# Altium PCB Arduino UNO R3 shield - full.pcbdoc
Units mil, origin at the board's own origin, x right, y up, seen from the top; angles counter-clockwise.
Board outline 2282.79 x 2105.48 mil, 2 copper layers (Top Layer, Bottom Layer); 24 components, 54 nets, 148 pads, 0 vias.
Unrouted connection lines stored in the file: 3.
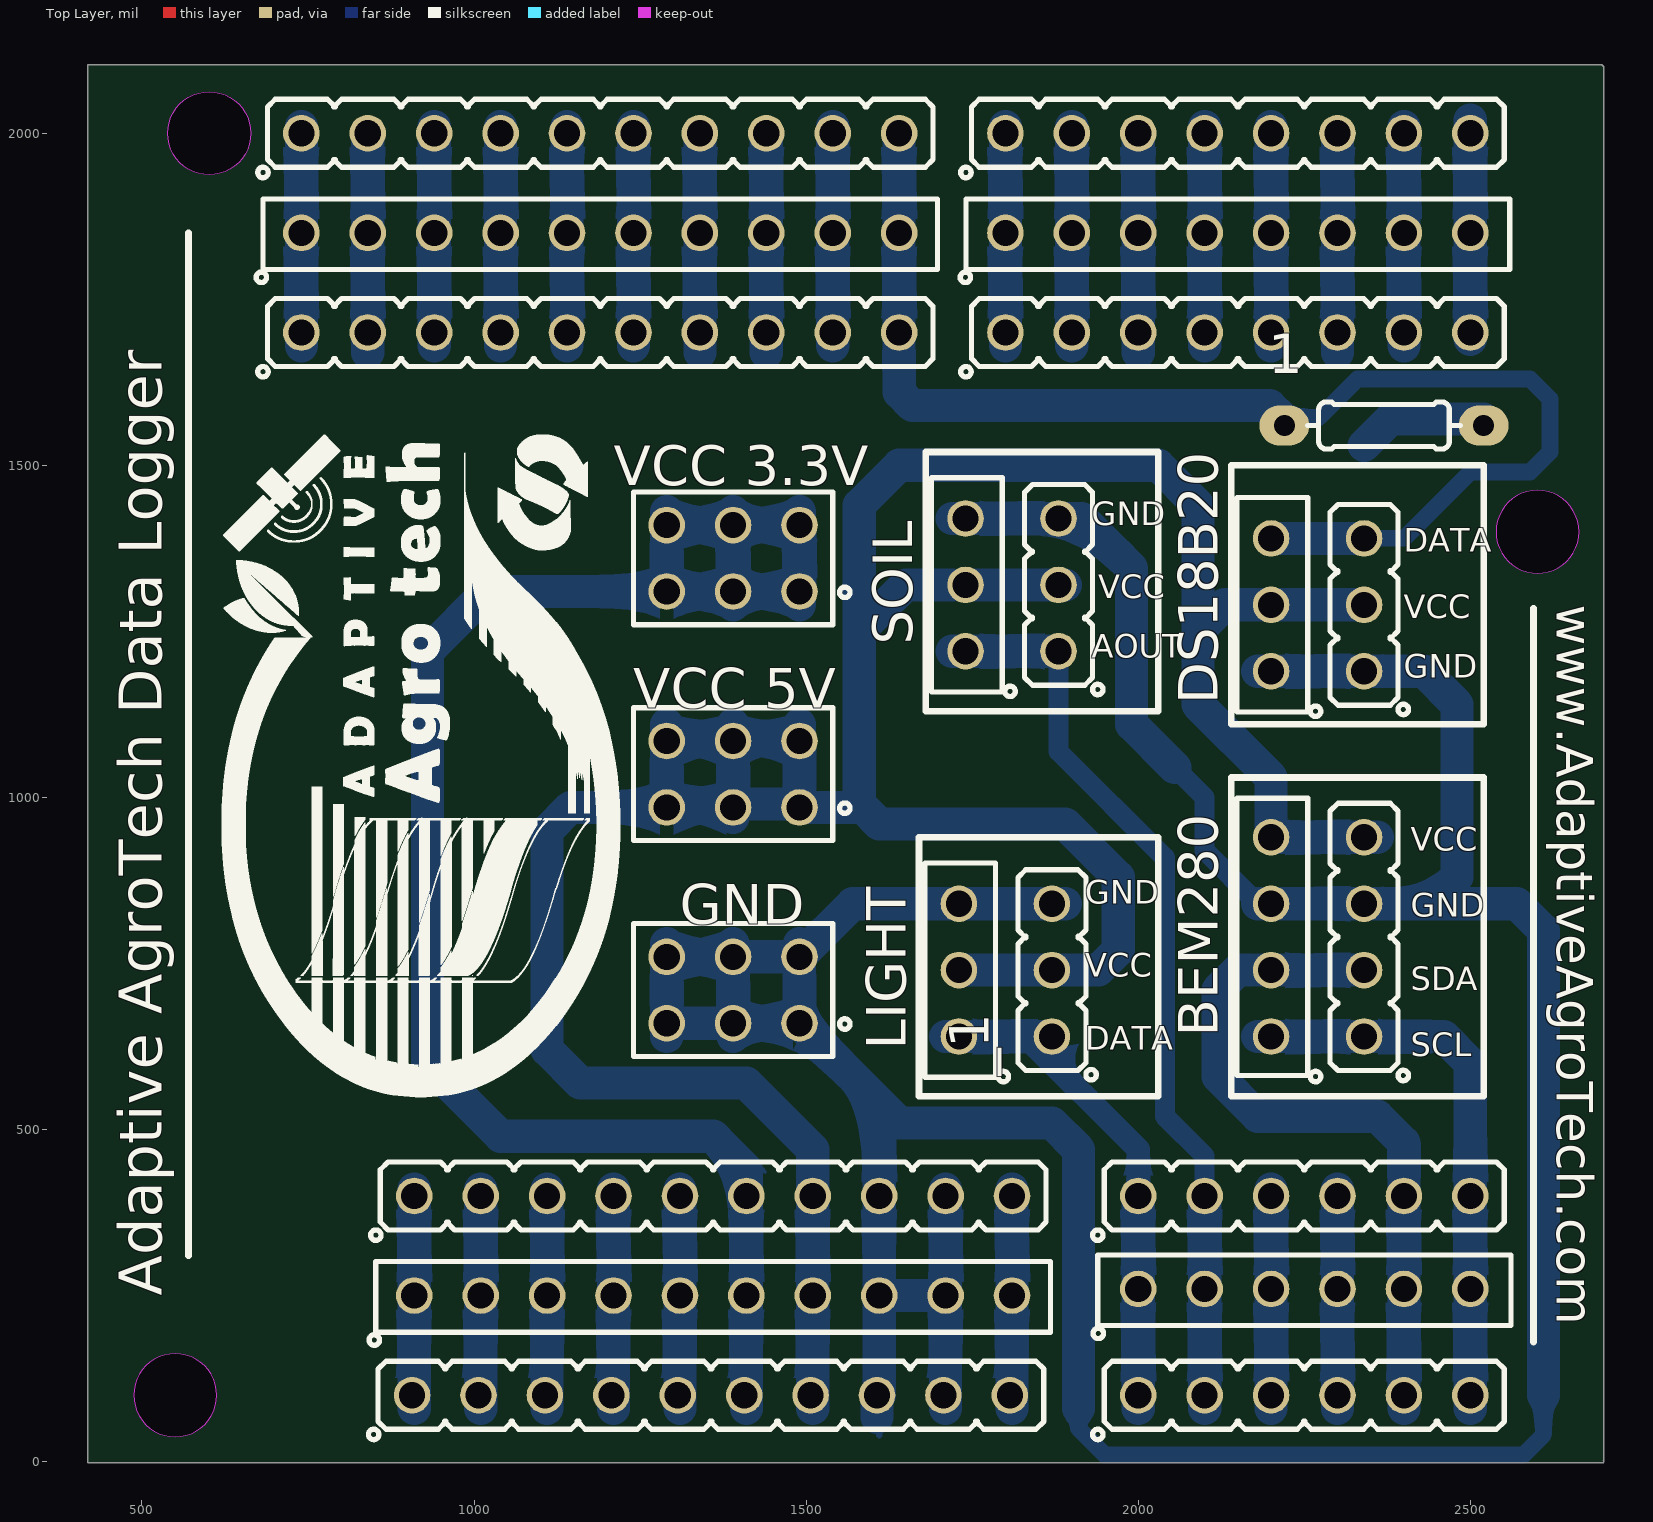
[diagram p0: Top Layer view]
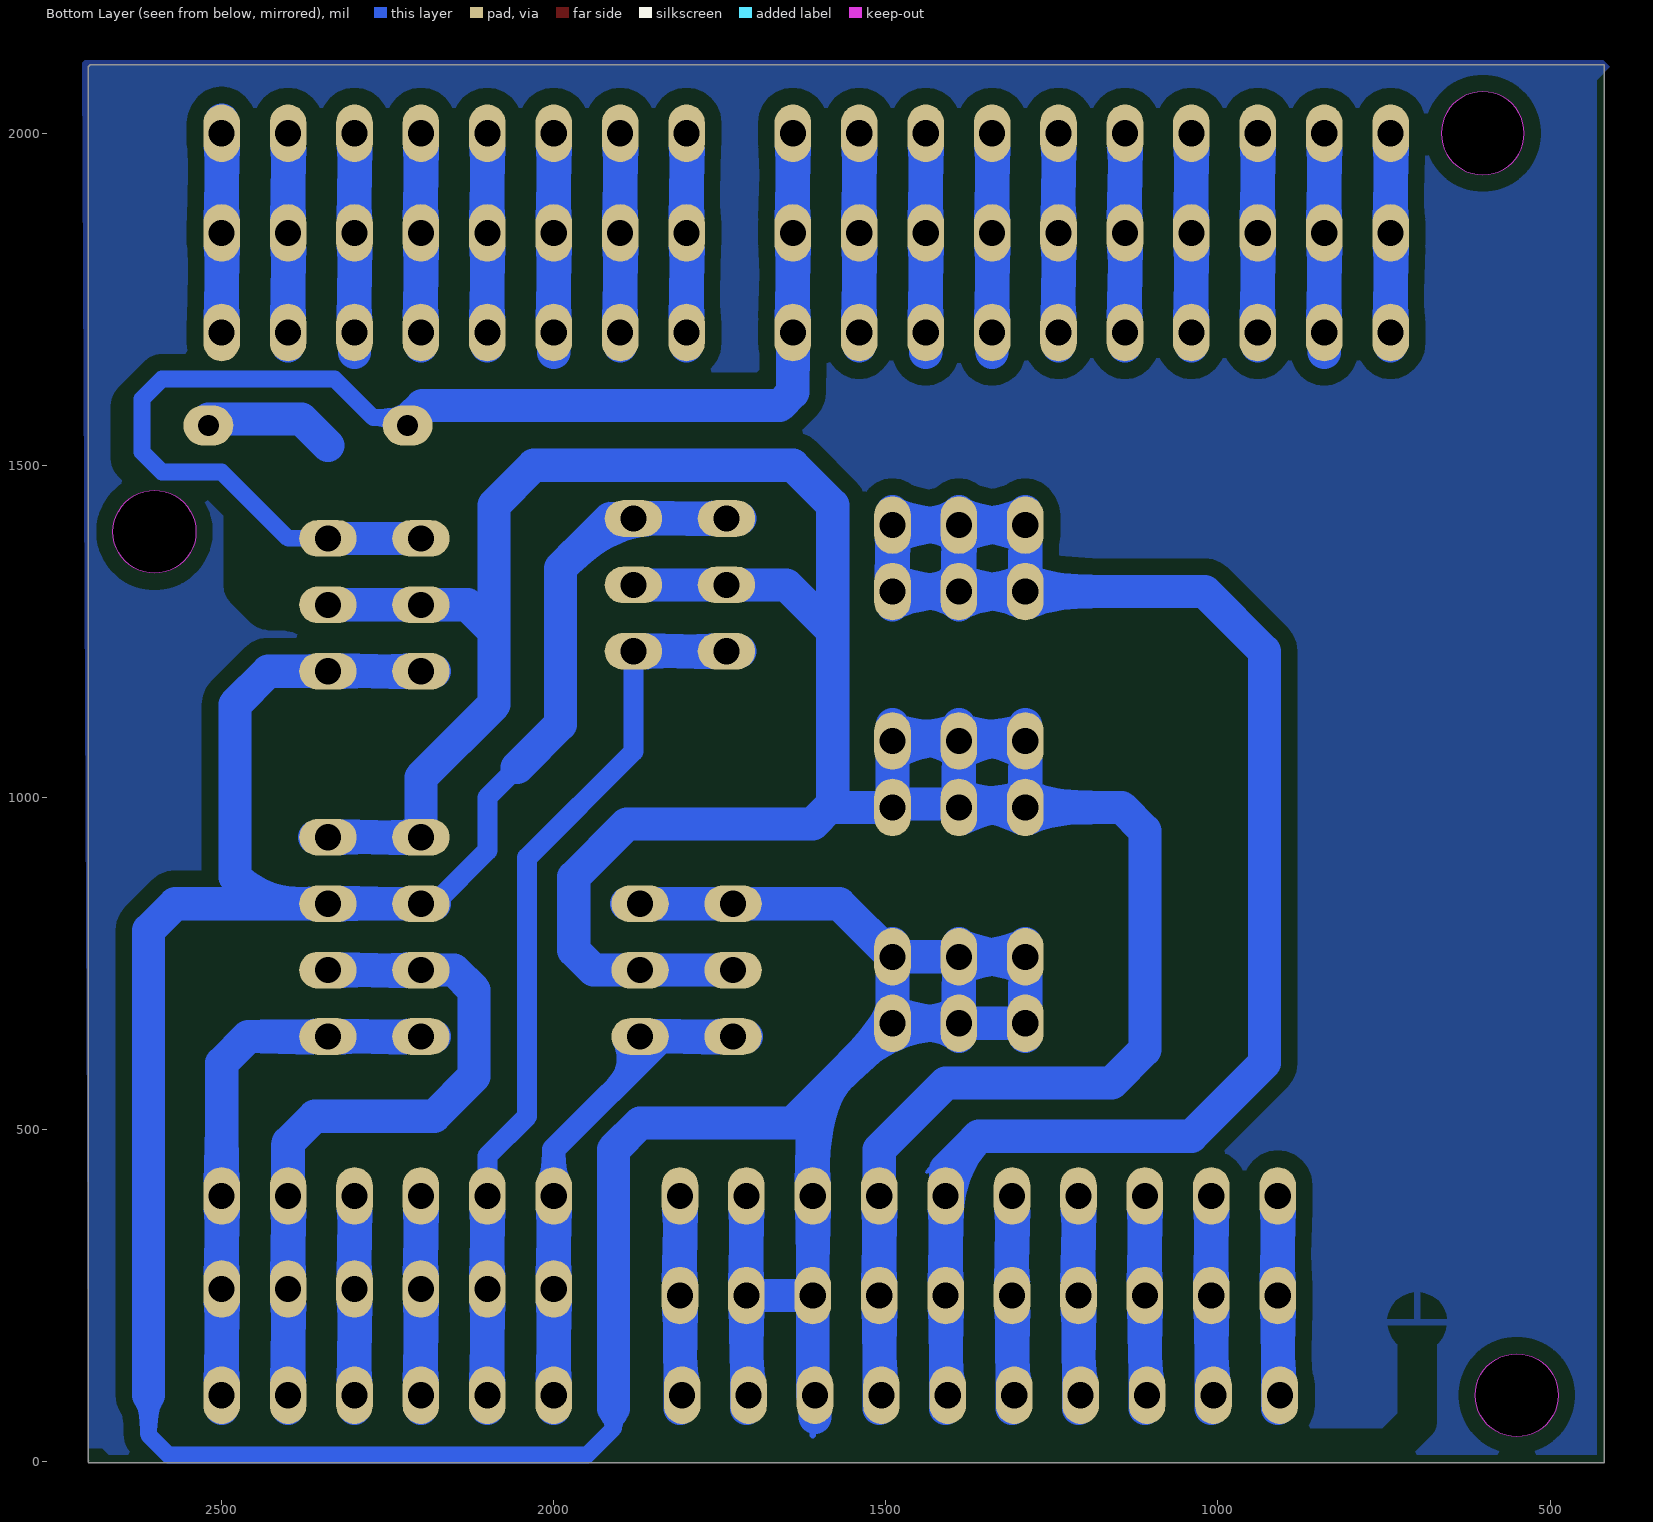
[diagram p1: Bottom Layer view, seen from below]

## Layer stack, top to bottom
Top Solder: solder mask 0.4, Solder Resist, Dk 3.5
Top Layer: signal copper 1.4
Dielectric1: dielectric 12.6, FR-4, Dk 4.8
Bottom Layer: signal copper 1.4
Bottom Solder: solder mask 0.4, Solder Resist, Dk 3.5

## Board outline
418.02,0 ccw(c420,0) 420,-1.98 2698.82,-1.98 ccw(c2698.82,0) 2700.8,0 ccw(c2698.82,0) 2700.42,1.17 ccw(c2698.82,2.33) 2700.8,2.33 2700.8,2099.58 ccw(c2698.82,2099.58) 2698.87,2101.56 ccw(c2696.88,2101.51) 2696.88,2103.5 420,2103.5 ccw(c420,2101.51) 418.02,2101.51
cut-out: 2538.68,1400 ccw(c2601.18,1400) 2601.18,1337.5 ccw(c2601.18,1400) 2663.68,1400 ccw(c2601.18,1400) 2601.18,1462.5 ccw(c2601.18,1400)
cut-out: 487.5,100 ccw(c550,100) 550,37.5 ccw(c550,100) 612.5,100 ccw(c550,100) 550,162.5 ccw(c550,100)
cut-out: 601.18,1937.5 cw(c601.18,2000) 538.68,2000 cw(c601.18,2000) 601.18,2062.5 cw(c601.18,2000) 663.68,2000 cw(c601.18,2000)

## Design rules (kind name [scope] priority, off if disabled: settings)
Clearance [All] p1: gap=10 ignorepadtopadclearanceinfootprint=FALSE
FabricationTestPointUsage TestPointUsage [All] p1: valid=0 allowmultiple=FALSE
FabricationTestpoint Testpoint [All] p1: side=3 testpointundercomponent=TRUE minsize=40 maxsize=100 preferedsize=60 minholesize=0 maxholesize=40 preferedholesize=32 testpointgrid=1 allowsidetop=TRUE allowsidebottom=TRUE usegrid=TRUE gridtolerance=0.01
PolygonConnect [All] p1: connectstyle=Relief reliefconductorwidth=10 reliefentries=4 polygonreliefangle="90 Angle" airgapwidth=10
RoutingVias [All] p1: holewidth=28 width=50 viastyle="Through Hole" minholewidth=28 minwidth=50 maxholewidth=28 maxwidth=50
SilkToSolderMaskClearance SilkscreenOverComponentPads [IsPad] p1: minsilkscreentomaskgap=10 clearancetoexposedcopper=TRUE
SolderMaskExpansion [All] p1: expansion=4
Width [All] p1: maxlimit=82 minlimit=10 preferedwidth=35
27 further rules are at their usual default settings.

## Components (designator, comment, footprint, x,y, rotation, side; value= is the part's Value field where it differs from the comment)
1 "Comment" R0125W_AX03 2370,1560 r0 top
_1 "Comment" HDR_M_1X3 1870,740 r90 top
? "Comment" HDR_M_1X3 1880,1320 r90 top
? "Comment" HDR_F_1X3 1740,1320 r90 top
? "Comment" HDR_F_1X3 1730,740 r90 top
? "Comment" HDR_F_1X4 2200,790 r90 top
? "Comment" HDR_M_1X4 2340,790 r90 top
? "Comment" HDR_F_2X3 1390,710 r180 top
? "Comment" HDR_F_2X3 1390,1035 r180 top
? "Comment" HDR_F_2X3 1390,1360 r180 top
? "Comment" HDR_F_1X3 2200,1290 r90 top
? "Comment" HDR_M_1X3 2340,1290 r90 top
? "Comment" HDR_M_1X6 2250,400 r0 top
? "Comment" HDR_M_1X10 1360,400 r0 top
? "Comment" HDR_F_1X10 1360,250 r0 top
? "Comment" HDR_M_1X10 1190,1700 r0 top
? "Comment" HDR_M_1X8 2150,1700 r0 top
? "Comment" HDR_M_1X10 1190,2000 r0 top
? "Comment" HDR_F_1X6 2250,260 r0 top
? "Comment" HDR_M_1X6 2250,100 r0 top
? "Comment" HDR_M_1X8 2150,2000 r0 top
? "Comment" HDR_M_1X10 1356.69,100 r0 top
? "Comment" HDR_F_1X10 1190,1850 r0 top
? "Comment" HDR_F_1X8 2150,1850 r0 top

## Footprints (in the part's own frame and the unit in brackets; to place one, negate y for a bottom-side part, rotate by r counter-clockwise, add the part's x,y. Pads: shape width x height; smd on the part's side, far side on the other; paste and mask are expansions set on the pad)
HDR_F_1X3 [mm] "HEADER FEMALE pitch: 2.54mm"
  round 1.4 / inner round 1.4 / far side oval 1.4x2.2 hole 1 mask+0.1: 1(-2.54,0) 2(0,0) 3(2.54,0)
  silkscreen extent -4.27,-1.9 4.1,1.3, body extent -3.93,-1.3 3.94,1.2, height 8.5
HDR_F_1X4 [mm] "HEADER FEMALE pitch: 2.54mm"
  round 1.4 / inner round 1.4 / far side oval 1.4x2.2 hole 1 mask+0.1: 1(-3.81,0) 2(-1.27,0) 3(1.27,0) 4(3.81,0)
  silkscreen extent -5.54,-1.9 5.3,1.3, body extent -5.2,-1.3 5.21,1.2, height 8.5
HDR_F_1X6 [mm] "HEADER FEMALE pitch: 2.54mm"
  round 1.4 / inner round 1.4 / far side oval 1.4x2.2 hole 1 mask+0.1: 1(-6.35,0) 2(-3.81,0) 3(-1.27,0) 4(1.27,0) 5(3.81,0) 6(6.35,0)
  silkscreen extent -8.08,-1.9 7.9,1.3, body extent -7.74,-1.3 7.75,1.2, height 8.5
HDR_F_1X8 [mm] "HEADER FEMALE pitch: 2.54mm"
  round 1.4 / inner round 1.4 / far side oval 1.4x2.2 hole 1 mask+0.1: 1(-8.89,0) 2(-6.35,0) 3(-3.81,0) 4(-1.27,0) 5(1.27,0) 6(3.81,0) 7(6.35,0) 8(8.89,0)
  silkscreen extent -10.62,-1.9 10.4,1.3, body extent -10.28,-1.3 10.29,1.2, height 8.5
HDR_F_1X10 [mm] "HEADER FEMALE pitch: 2.54mm"
  round 1.4 / inner round 1.4 / far side oval 1.4x2.2 hole 1 mask+0.1: 1(-11.43,0) 2(-8.89,0) 3(-6.35,0) 4(-3.81,0) 5(-1.27,0) 6(1.27,0) 7(3.81,0) 8(6.35,0) 9(8.89,0) 10(11.43,0)
  silkscreen extent -13.16,-1.9 12.9,1.3, body extent -12.82,-1.3 12.83,1.2, height 8.5
HDR_F_2X3 [mm] "Connector; Header; 3x2 Position"
  round 1.4 / inner round 1.4 / far side oval 1.4x2.2 hole 1: 1(-2.54,1.27) 2(-2.54,-1.27) 3(0,1.27) 4(0,-1.27) 5(2.54,1.27) 6(2.54,-1.27)
  silkscreen extent -4.47,-2.54 3.81,2.54, body extent -3.81,-2.54 3.81,2.54, height 8.5
HDR_M_1X3 [mm] "Connector; Header; 3 Position"
  round 1.4 / inner round 1.4 / far side oval 1.4x2.2 hole 1 mask+0.1: 1(-2.54,0) 2(0,0) 3(2.54,0)
  silkscreen extent -4.2,-1.7 3.84,1.3, body extent -3.78,-1.27 3.84,1.27, height 8.54
HDR_M_1X4 [mm] "Connector; Header; 4 Position"
  round 1.4 / inner round 1.4 / far side oval 1.4x2.2 hole 1 mask+0.1: 1(-3.81,0) 2(-1.27,0) 3(1.27,0) 4(3.81,0)
  silkscreen extent -5.5,-1.7 5.11,1.3, body extent -5.08,-1.27 5.08,1.27, height 8.54
HDR_M_1X6 [mm] "Connector; Header; 6 Position"
  round 1.4 / inner round 1.4 / far side oval 1.4x2.2 hole 1 mask+0.1: 1(-6.35,0) 2(-3.81,0) 3(-1.27,0) 4(1.27,0) 5(3.81,0) 6(6.35,0)
  silkscreen extent -8.1,-1.7 7.65,1.3, body extent -7.62,-1.3 7.62,1.19, height 8.54
HDR_M_1X8 [mm] "Connector; Header; 8 Position"
  round 1.4 / inner round 1.4 / far side oval 1.4x2.2 hole 1 mask+0.1: 1(-8.89,0) 2(-6.35,0) 3(-3.81,0) 4(-1.27,0) 5(1.27,0) 6(3.81,0) 7(6.35,0) 8(8.89,0)
  silkscreen extent -10.6,-1.7 10.19,1.3, body extent -10.16,-1.3 10.16,1.19, height 8.54
HDR_M_1X10 [mm] "Connector; Header; 10 Position"
  round 1.4 / inner round 1.4 / far side oval 1.4x2.2 hole 1 mask+0.1: 1(-11.43,0) 2(-8.89,0) 3(-6.35,0) 4(-3.81,0) 5(-1.27,0) 6(1.27,0) 7(3.81,0) 8(6.35,0) 9(8.89,0) 10(11.43,0)
  silkscreen extent -13.1,-1.7 12.73,1.3, body extent -12.7,-1.3 12.7,1.19, height 8.54
R0125W_AX03 [mil] "RESISTOR 1/8 WATT, AXIAL0.3 INCH SPACING"
  oval 75x60 hole 31.5: 1(-150,0) 2(150,0)
  silkscreen extent -115,-35 115,35, body extent -164,-33 164,33, height 73

## Nets (pads, with @x,y where several pads share a name; then routed paths per layer and width w, separated by ;. In a path a pad name is that pad's centre, name@x,y a point inside that pad or via, vN(x,y) a via of type N, cw(c..) or ccw(c..) an arc to the next point about the centre after c; other vN are vias at no path point)
22: ?.1@2200,640 ?.1@2340,640 ?.6@2500,100 ?.6@2500,260 ?.6@2500,400 | length 886.6
  Bottom Layer w50: ?.1@2180,640 2200,640 2340,640 2460,640 2500,600 ?.6@2500,380 ; ?.6@2500,80 ?.6@2500,410
???: ?.1@1490,660 ?.1@2200,1190 ?.1@2340,1190 ?.2@1490,760 ?.3@1390,660 ?.3@1730,840 ?.3@1740,1420 ?.3@1880,1420 ?.3@2200,840 ?.3@2340,840 ?.4@1390,760 ?.5@1290,660 ?.6@1290,760 ?.8@1606.69,100 ?.8@1610,250 ?.8@1610,400 ?.9@1706.69,100 ?.9@1710,250 ?.9@1710,400 | length 6514.1
  Bottom Layer w10: ?.8@1606.69,80 1610,76.69 1610,40
  Bottom Layer w25: 1910,80 1910,50 1950,10 2580,10 2610,40 2610,100
  Bottom Layer w30: 2055,1045 2100,1000 2100,920 ?.3@2180,840
  Bottom Layer w50: ?.5@1290,640 ?.5@1290,660 ; ?.6@1290,780 ?.6@1290,760 ; ?.3@1390,640 ?.3@1390,660 ; ?.4@1390,780 ?.4@1390,760 ; ?.1@1470,660 ?.3@1390,660 ; ?.2@1470,760 ?.4@1390,760 ; ?.2@1490,780 ?.2@1490,760 ; ?.8@1606.69,66.69 1606.69,80 ?.8@1606.69,100 ; ?.8@1610,100 ?.8@1610,250 ; ?.9@1710,80 ?.9@1710,250 ; ?.9@1710,410 1710,400 ?.9@1710,250 ; ?.3@1720,1420 1740,1420 1880,1420 1915,1420 1990,1345 1990,1110 2055,1045 ; 1890,840 1730,840 1570,840 ?.2@1490,760 ; 1910,80 1910,470 1870,510 1640,510 1610,540 ; ?.3@2180,840 2200,840 2340,840 2440,840 ; ?.1@2180,1190 2200,1190 2340,1190 2430,1190 2480,1140 2480,880 2440,840 ; 2610,100 2610,800 2570,840 2440,840 ; ?.5@1290,660 ?.6@1290,760 ; ?.5@1290,660 ?.3@1390,660 ; ?.6@1290,760 ?.4@1390,760 ; ?.3@1390,660 ?.4@1390,760 ; ?.2@1490,760 1490,660 1610,540 ; ?.8@1610,250 ?.9@1710,250 ; ?.8@1610,250 1610,400 1610,540
???: _1.3
???3.3: ?.1@1490,1310 ?.2@1490,1410 ?.3@1390,1310 ?.4@1390,1410 ?.5@1290,1310 ?.6@1290,1410 ?.6@1406.69,100 ?.6@1410,250 ?.6@1410,400 | length 2683.6
  Bottom Layer w50: ?.6@1290,1430 ?.6@1290,1410 ; ?.3@1390,1290 ?.4@1390,1430 ; ?.6@1410,80 1410,250 1410,400 1410,440 1360,490 1040,490 930,600 930,1220 1020,1310 ?.5@1290,1310 ; ?.1@1470,1310 1390,1310 ?.5@1290,1310 ; ?.2@1470,1410 ?.6@1290,1410 ; ?.1@1490,1290 ?.2@1490,1430 ; ?.5@1290,1310 ?.6@1290,1410
???5: 1.2 ?.1@1490,985 ?.2@1490,1085 ?.2@1730,740 ?.2@1740,1320 ?.2@1880,1320 ?.3@1390,985 ?.3@2200,1390 ?.3@2340,1390 ?.4@1390,1085 ?.4@2200,940 ?.4@2340,940 ?.5@1290,985 ?.6@1290,1085 ?.7@1506.69,100 ?.7@1510,250 ?.7@1510,400 _1.2 | length 5557
  Bottom Layer w25: ?.2@1720,1320 ?.2@1740,1320
  Bottom Layer w50: ?.6@1290,1110 ?.6@1290,1090 ; ?.3@1390,970 1390,985 ?.3@1390,990 ; ?.4@1390,1110 ?.4@1390,1090 ; ?.1@1470,990 ?.3@1390,990 ; ?.2@1470,1090 ?.4@1390,1090 ; ?.2@1490,1110 1490,1085 1490,985 1585,985 ; ?.7@1510,80 1510,250 1510,400 1510,470 1410,570 1160,570 1110,620 1110,950 1145,985 1290,985 ?.5@1290,990 ; ?.2@1720,1320 1650,1320 1580,1250 ; ?.2@1730,740 _1.2 1940,740 1970,770 1970,880 1890,960 1610,960 1585,985 ; ?.2@1740,1320 1880,1320 ?.2@1890,1320 ; ?.3@2200,1390 ?.3@2340,1390 ; 2220,1290 2130,1290 2090,1250 ; 2340,1530 2380,1570 1.2@2520,1570 ; ?.4@2360,940 2340,940 2200,940 2200,1030 2090,1140 2090,1230 2090,1250 ; ?.5@1290,990 ?.3@1390,990 ; ?.5@1290,990 1290,1085 ?.6@1290,1090 ; ?.6@1290,1090 ?.4@1390,1090 ; ?.3@1390,990 1390,1085 ?.4@1390,1090 ; 1580,1250 1580,990 1585,985 ; 1580,1250 1580,1440 1640,1500 2030,1500 2090,1440 2090,1250
NewNet1: 
NewNet2: 
NewNet3: 
NewNet4: 
NewNet5: 
NewNet6: 
NewNet7: 
NewNet8: 
NewNet9: 
NewNet10: 
NewNet11: 
NewNet12: 
NewNet13: 
NewNet14: 
NewNet15: 1.1 ?.2@2200,1290 ?.2@2340,1290 ?.10@1640,1700 ?.10@1640,1850 ?.10@1640,2000 | length 2026
  Bottom Layer w25: 1.1@2216,1572 2272,1572 2330,1630 2590,1630 2620,1600 2620,1520 2590,1490 2500,1490 2400,1390 2310,1390
  Bottom Layer w50: ?.10@1640,2000 1640,1850 1640,1700 1640,1610 1660,1590 2198,1590 1.1@2216,1572 ; ?.2@2180,1290 2200,1290 ?.2@2340,1290
NewNet16: 
NewNet17: ?.1@1730,640 ?.1@2000,100 ?.1@2000,260 ?.1@2000,400 _1.1 | length 790.4
  Bottom Layer w35: _1.1@1830,640 2000,470 ?.1@2000,400
  Bottom Layer w50: ?.1@1710,640 1730,640 _1.1 ; ?.1@2000,80 2000,100 2000,260 ?.1@2000,400
NewNet18: ?.1@1740,1220 ?.1@1880,1220 ?.2@2100,100 ?.2@2100,260 ?.2@2100,400 | length 1405.3
  Bottom Layer w30: ?.1@1880,1220 1880,1069.29 2040,909.29 2040,520 2100,460 2100,400 2100,390 ?.2@2090,380
  Bottom Layer w50: ?.1@1720,1220 1740,1220 ?.1@1880,1220 ; ?.2@2100,80 2100,100 2100,260 ?.2@2100,390
NewNet19: ?.3@2200,100 ?.3@2200,260 ?.3@2200,400 | length 330
  Bottom Layer w50: ?.3@2200,80 ?.3@2200,410
NewNet20: ?.4@2300,100 ?.4@2300,260 ?.4@2300,400 | length 330
  Bottom Layer w50: ?.4@2300,80 ?.4@2300,410
NewNet21: ?.2@2200,740 ?.2@2340,740 ?.5@2400,100 ?.5@2400,260 ?.5@2400,400 | length 1073.8
  Bottom Layer w50: ?.2@2170,740 2150,740 2120,710 2120,580 2180,520 2360,520 2400,480 2400,400 2400,260 2400,100 ?.5@2400,80 ; ?.2@2180,740 2200,740 ?.2@2340,740
NewNet22: ?.10@1806.69,100 ?.10@1810,250 ?.10@1810,400 | length 330
  Bottom Layer w50: ?.10@1810,80 ?.10@1810,410
NewNet23: 
NewNet24: 
NewNet25: 
NewNet26: 
NewNet27: ?.5@1306.69,100 ?.5@1310,250 ?.5@1310,400 | length 330
  Bottom Layer w50: ?.5@1310,80 ?.5@1310,410
NewNet28: ?.4@1206.69,100 ?.4@1210,250 ?.4@1210,400 | length 330
  Bottom Layer w50: ?.4@1210,80 ?.4@1210,410
NewNet29: ?.3@1106.69,100 ?.3@1110,250 ?.3@1110,400 | length 330
  Bottom Layer w50: ?.3@1110,80 ?.3@1110,410
NewNet30: ?.2@1006.69,100 ?.2@1010,250 ?.2@1010,400 | length 330
  Bottom Layer w50: ?.2@1010,80 ?.2@1010,410
NewNet31: ?.1@906.69,100 ?.1@910,250 ?.1@910,400 | length 330
  Bottom Layer w50: ?.1@910,80 ?.1@910,410
NewNet32: 
NewNet33: ?.9@1540,1700 ?.9@1540,1850 ?.9@1540,2000 | length 330
  Bottom Layer w50: ?.9@1540,1680 ?.9@1540,2010
NewNet34: ?.8@1440,1700 ?.8@1440,1850 ?.8@1440,2000 | length 330
  Bottom Layer w50: ?.8@1440,1670 ?.8@1440,2000
NewNet35: ?.7@1340,1700 ?.7@1340,1850 ?.7@1340,2000 | length 330
  Bottom Layer w50: ?.7@1340,1670 ?.7@1340,2000
NewNet36: ?.6@1240,1700 ?.6@1240,1850 ?.6@1240,2000 | length 330
  Bottom Layer w50: ?.6@1240,1680 ?.6@1240,2010
NewNet37: ?.5@1140,1700 ?.5@1140,1850 ?.5@1140,2000 | length 330
  Bottom Layer w50: ?.5@1140,1680 ?.5@1140,2010
NewNet38: ?.4@1040,1700 ?.4@1040,1850 ?.4@1040,2000 | length 330
  Bottom Layer w50: ?.4@1040,1680 ?.4@1040,2010
NewNet39: ?.3@940,1700 ?.3@940,1850 ?.3@940,2000 | length 330
  Bottom Layer w50: ?.3@940,1680 ?.3@940,2010
NewNet40: ?.2@840,1700 ?.2@840,1850 ?.2@840,2000 | length 330
  Bottom Layer w50: ?.2@840,1670 ?.2@840,2000
NewNet41: ?.1@740,1700 ?.1@740,1850 ?.1@740,2000 | length 330
  Bottom Layer w50: ?.1@740,1680 ?.1@740,2010
NewNet42: ?.1@1800,1700 ?.1@1800,1850 ?.1@1800,2000 | length 330
  Bottom Layer w50: ?.1@1800,1680 ?.1@1800,2010
NewNet43: ?.2@1900,1700 ?.2@1900,1850 ?.2@1900,2000 | length 330
  Bottom Layer w50: ?.2@1900,1680 ?.2@1900,2010
NewNet44: ?.3@2000,1700 ?.3@2000,1850 ?.3@2000,2000 | length 330
  Bottom Layer w50: ?.3@2000,1670 ?.3@2000,2000
NewNet45: ?.4@2100,1700 ?.4@2100,1850 ?.4@2100,2000 | length 330
  Bottom Layer w50: ?.4@2100,1680 ?.4@2100,2010
NewNet46: ?.5@2200,1700 ?.5@2200,1850 ?.5@2200,2000 | length 330
  Bottom Layer w50: ?.5@2200,1680 ?.5@2200,2010
NewNet47: ?.6@2300,1700 ?.6@2300,1850 ?.6@2300,2000 | length 330
  Bottom Layer w50: ?.6@2300,1670 ?.6@2300,2000
NewNet48: ?.7@2400,1700 ?.7@2400,1850 ?.7@2400,2000 | length 330
  Bottom Layer w50: ?.7@2400,1680 ?.7@2400,2010
NewNet49: ?.8@2500,1700 ?.8@2500,1850 ?.8@2500,2000 | length 330
  Bottom Layer w50: ?.8@2500,1690 ?.8@2500,2020

## Polygon pours and split planes (outlines as drawn)
??? on Bottom Layer "Bottom Layer-???" (solid, remove dead copper, pour order 10): 2710,2110 420,2110 410,2100 430,2080 430,10 2670,10 2680,20 2700,20

## Silkscreen, mask and mechanical layers (free items; w line width, h text height)
Top Overlay:
  drawing of 5840 lines, arcs and shapes, not listed
  text "VCC 3.3V" at 1210,1470 h60
  text "GND" at 1930,1410 h35
  text "DATA" at 2400,1370 h35
  text "VCC" at 1940,1300 h35
  text "www.AdaptiveAgroTech.com" at 2630,1290 h55 r270
  text "VCC" at 2400,1270 h35
  text "SOIL" at 1660,1230 h60 r90
  text "AOUT" at 1930,1210 h35
  text "GND" at 2400,1180 h35
  text "DS18B20" at 2120,1140 h60 r90
  text "VCC 5V" at 1240,1135 h60
  text "VCC" at 2410,920 h35
  text "GND" at 1920,840 h35
  text "GND" at 2410,820 h35
  text "GND" at 1310,810 h60
  text "VCC" at 1920,730 h35
  text "SDA" at 2410,710 h35
  text "BEM280" at 2120,640 h60 r90
  text "LIGHT" at 1650,620 h60 r90
  text "DATA" at 1920,620 h35
  text "SCL" at 2410,610 h35
  text "Adaptive AgroTech Data Logger" at 530,250 h65 r90
Mechanical 1:
  circle w0.5: c741.18,2000 r10
  circle w0.5: c841.18,2000 r10
  circle w0.5: c941.18,2000 r10
  circle w0.5: c1041.18,2000 r10
  circle w0.5: c1141.18,2000 r10
  circle w0.5: c1241.18,2000 r10
  circle w0.5: c1341.18,2000 r10
  circle w0.5: c1441.18,2000 r10
  circle w0.5: c1541.18,2000 r10
  circle w0.5: c1641.18,2000 r10
  circle w0.5: c1800,2000 r10
  circle w0.5: c1900,2000 r10
  circle w0.5: c2000,2000 r10
  circle w0.5: c2100,2000 r10
  circle w0.5: c2200,2000 r10
  circle w0.5: c2300,2000 r10
  circle w0.5: c2400,2000 r10
  circle w0.5: c2500,2000 r10
  circle w0.5: c1100,100 r10
  circle w0.5: c1200,100 r10
  circle w0.5: c1300,100 r10
  circle w0.5: c1400,100 r10
  circle w0.5: c1500,100 r10
  circle w0.5: c1600,100 r10
  circle w0.5: c1700,100 r10
  circle w0.5: c1800,100 r10
  circle w0.5: c2000,100 r10
  circle w0.5: c2100,100 r10
  circle w0.5: c2200,100 r10
  circle w0.5: c2300,100 r10
  circle w0.5: c2400,100 r10
  circle w0.5: c2500,100 r10
  circle w0.5: c550,100 r62.5
  circle w0.5: c2601.18,1400 r62.5
  circle w0.5: c601.18,2000 r62.5
  lines w3.94: 2698.82,0 2688.82,-10 420,-10 420,2101.51 2696.88,2101.51 2698.82,2099.58 2698.82,2.33
Mechanical 16:
  lines w5: -3720,-1350 -3520,-1350 ; -3720,550 -3520,550 ; -3720,2450 -3520,2450 ; -845,-3250 -845,-3050 ; -845,4150 -845,4350 ; 1680,-3050 3080,-3050 ; 2030,-3250 2030,-3050 ; 2030,4150 2030,4350 ; 3080,-2750 7580,-2750 ; 3080,-2450 7580,-2450 ; 3080,-2150 4580,-2150 ; 4580,-3050 4580,-2450 4580,-1850 ; 4905,-3250 4905,-3050 ; 4905,4150 4905,4350 ; 6680,-3050 6680,-2450 ; 7580,-1350 7780,-1350 ; 7580,550 7780,550 ; 7580,2450 7780,2450 ; 3080,-3050 7580,-3050 ; 3080,-3050 3080,-1850 4580,-1850 ; 4580,-1850 7580,-1850 7580,-3050 ; 7580,-3050 -3520,-3050 -3520,4150 7580,4150 7580,-3050 ; -3720,-3250 7780,-3250 7780,4350 -3720,4350 -3720,-3250
  text "1" at -2293,4215 h70
  text "2" at 567,4215 h70
  text "3" at 3447,4215 h70
  text "4" at 6317,4215 h70
  text "A" at -3645,3309 h70
  text "A" at 7655,3309 h70
  text "B" at -3645,1417 h70
  text "B" at 7655,1417 h70
  text "C" at -3645,-493 h70
  text "C" at 7655,-493 h70
  text "ENGINEER:" at 3130,-1950 h45
  text "TITLE:" at 4630,-1950 h45
  text "PCB DESIGNER:" at 3130,-2245 h45
  text "D" at -3645,-2383 h70
  text "D" at 7655,-2383 h70
  text "DATE:" at 3130,-2550 h45
  text "PART NO.:" at 4630,-2550 h45
  text "REV:" at 6730,-2550 h45
  text ".PRINT_DATE" at 3180,-2670 h70
  text "FILE NAME:" at 3130,-2850 h45
  text "DWG NO:" at 4630,-2850 h45
  text "SCALE:" at 6730,-2850 h45
  text ".PCB_FILE_NAME_NO_PATH" at 3180,-2970 h70
  text "1" at -2293,-3185 h70
  text "2" at 567,-3185 h70
  text "3" at 3447,-3185 h70
  text "4" at 6317,-3185 h70